# Altium PCB PCB1.PcbDoc
Units mm, origin at the board's own origin, x right, y up, seen from the top; angles counter-clockwise.
Board outline 50 x 50 mm, 4 copper layers (Top Layer, Internal Plane 1, Internal Plane 2, Bottom Layer), stack 0.462 mm thick; 29 components, 23 nets, 105 pads, 0 vias.
Unrouted connection lines stored in the file: 52.
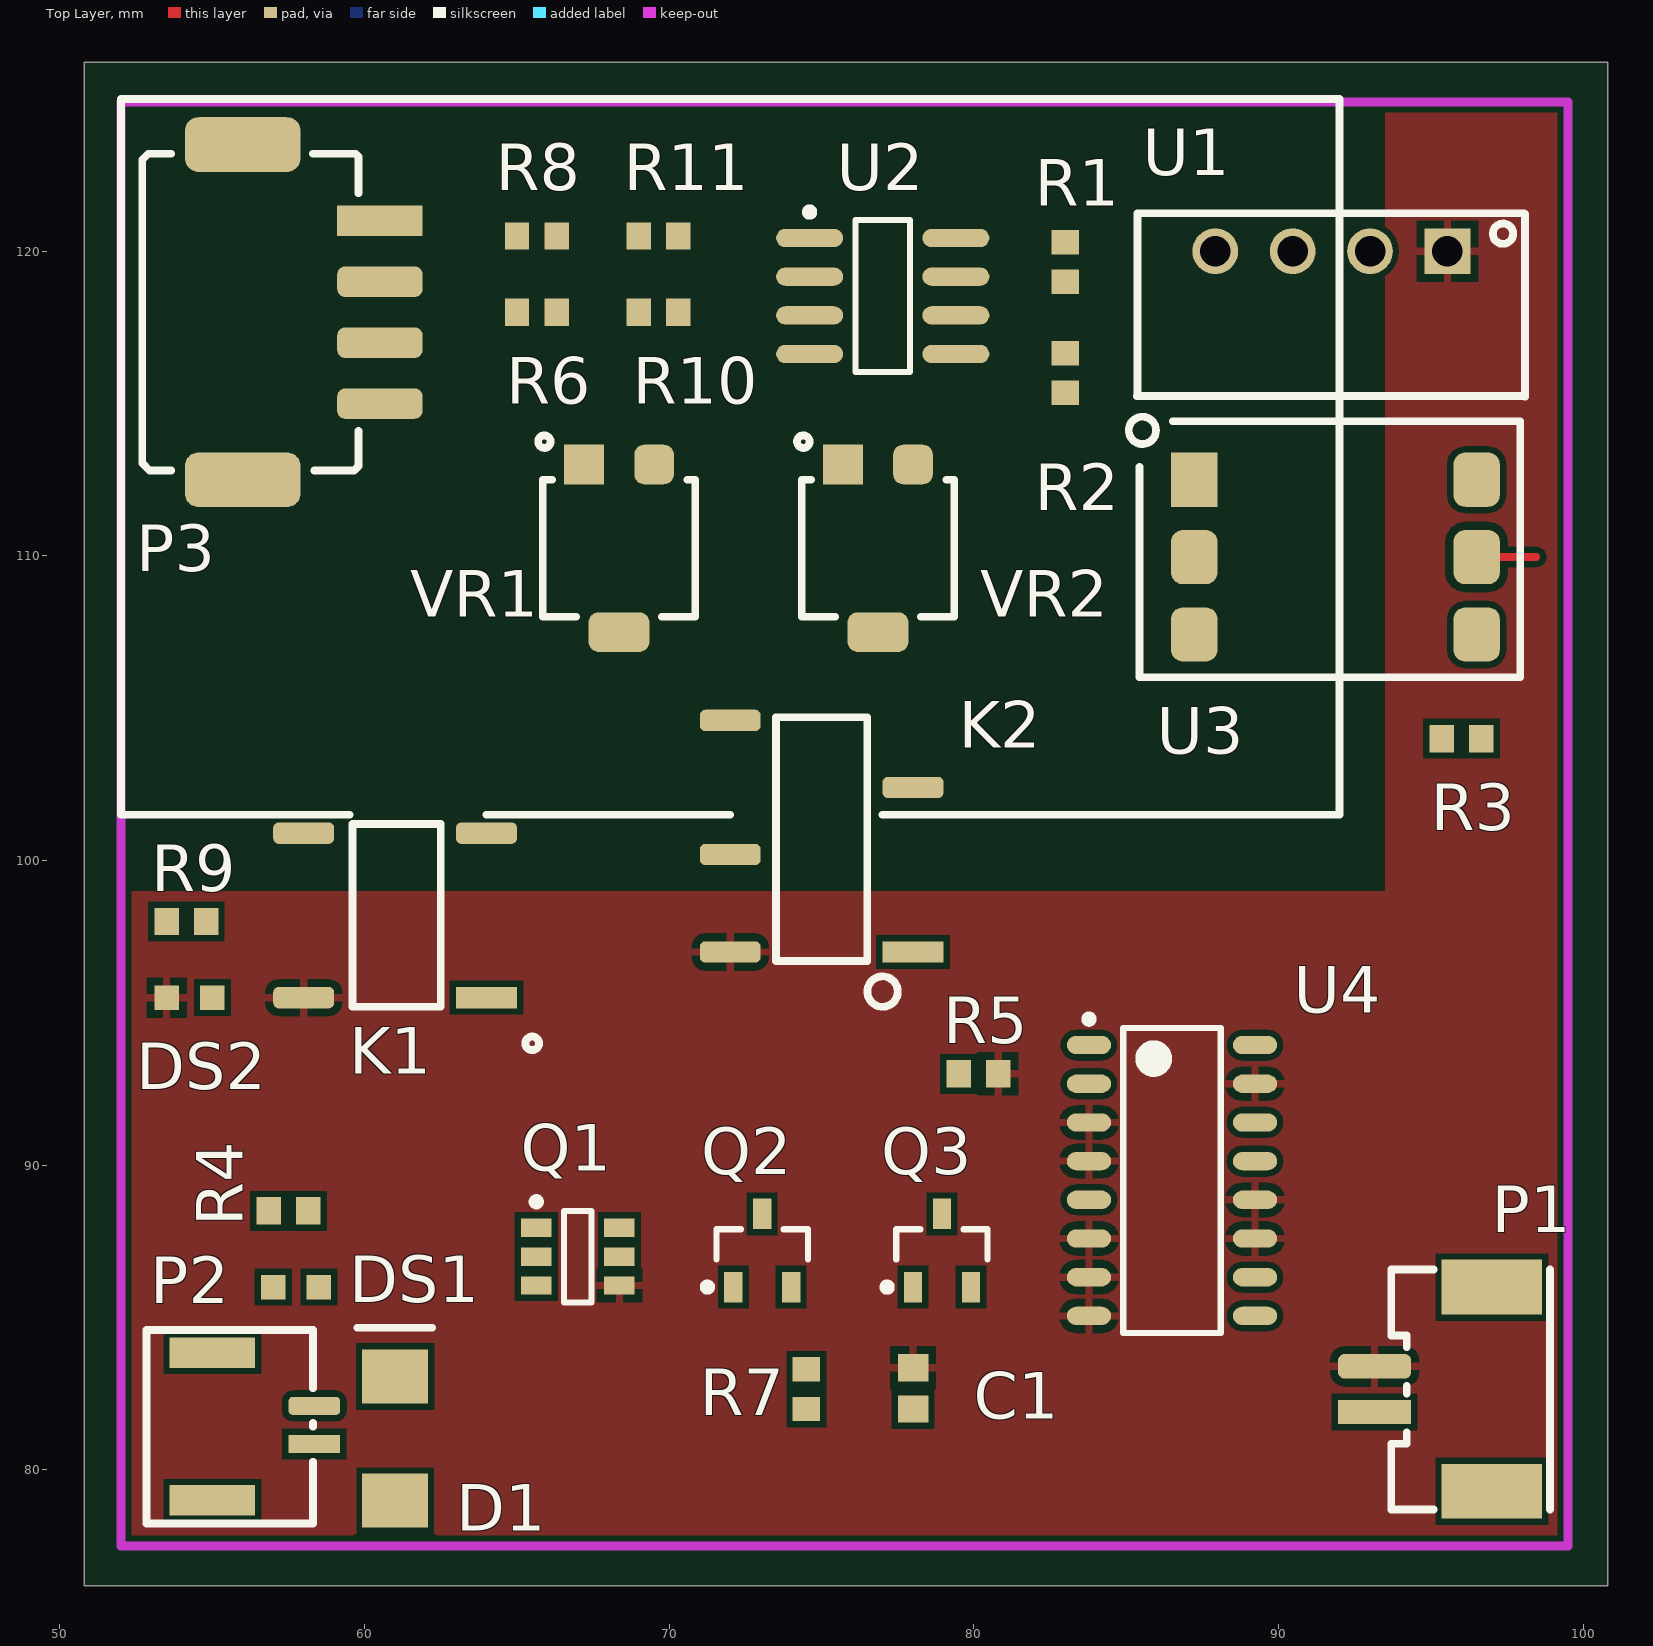
[diagram p0: Top Layer view]
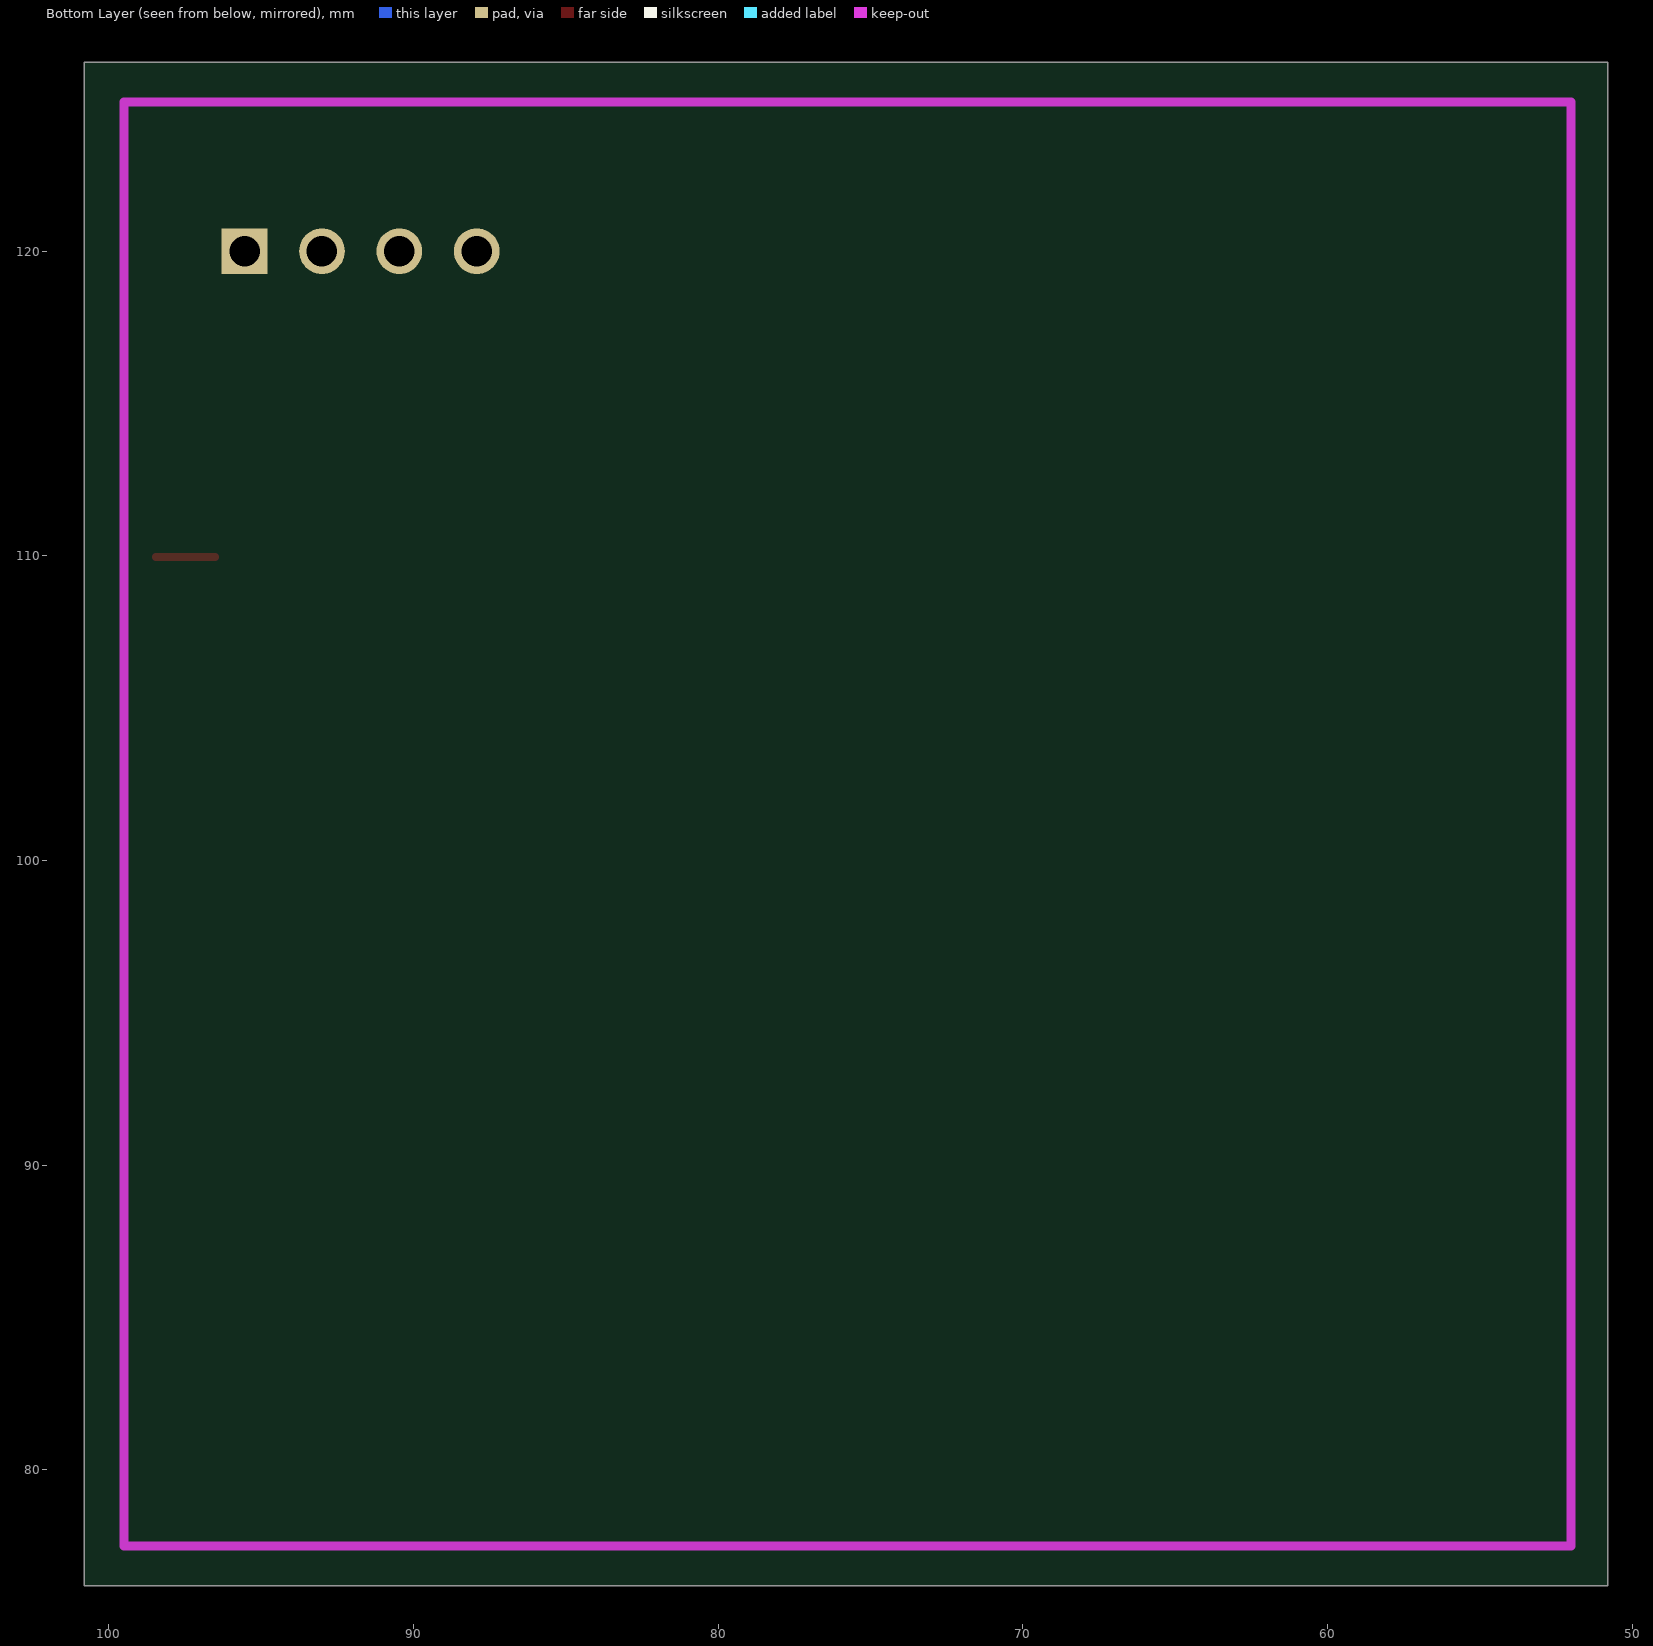
[diagram p1: Bottom Layer view, seen from below]
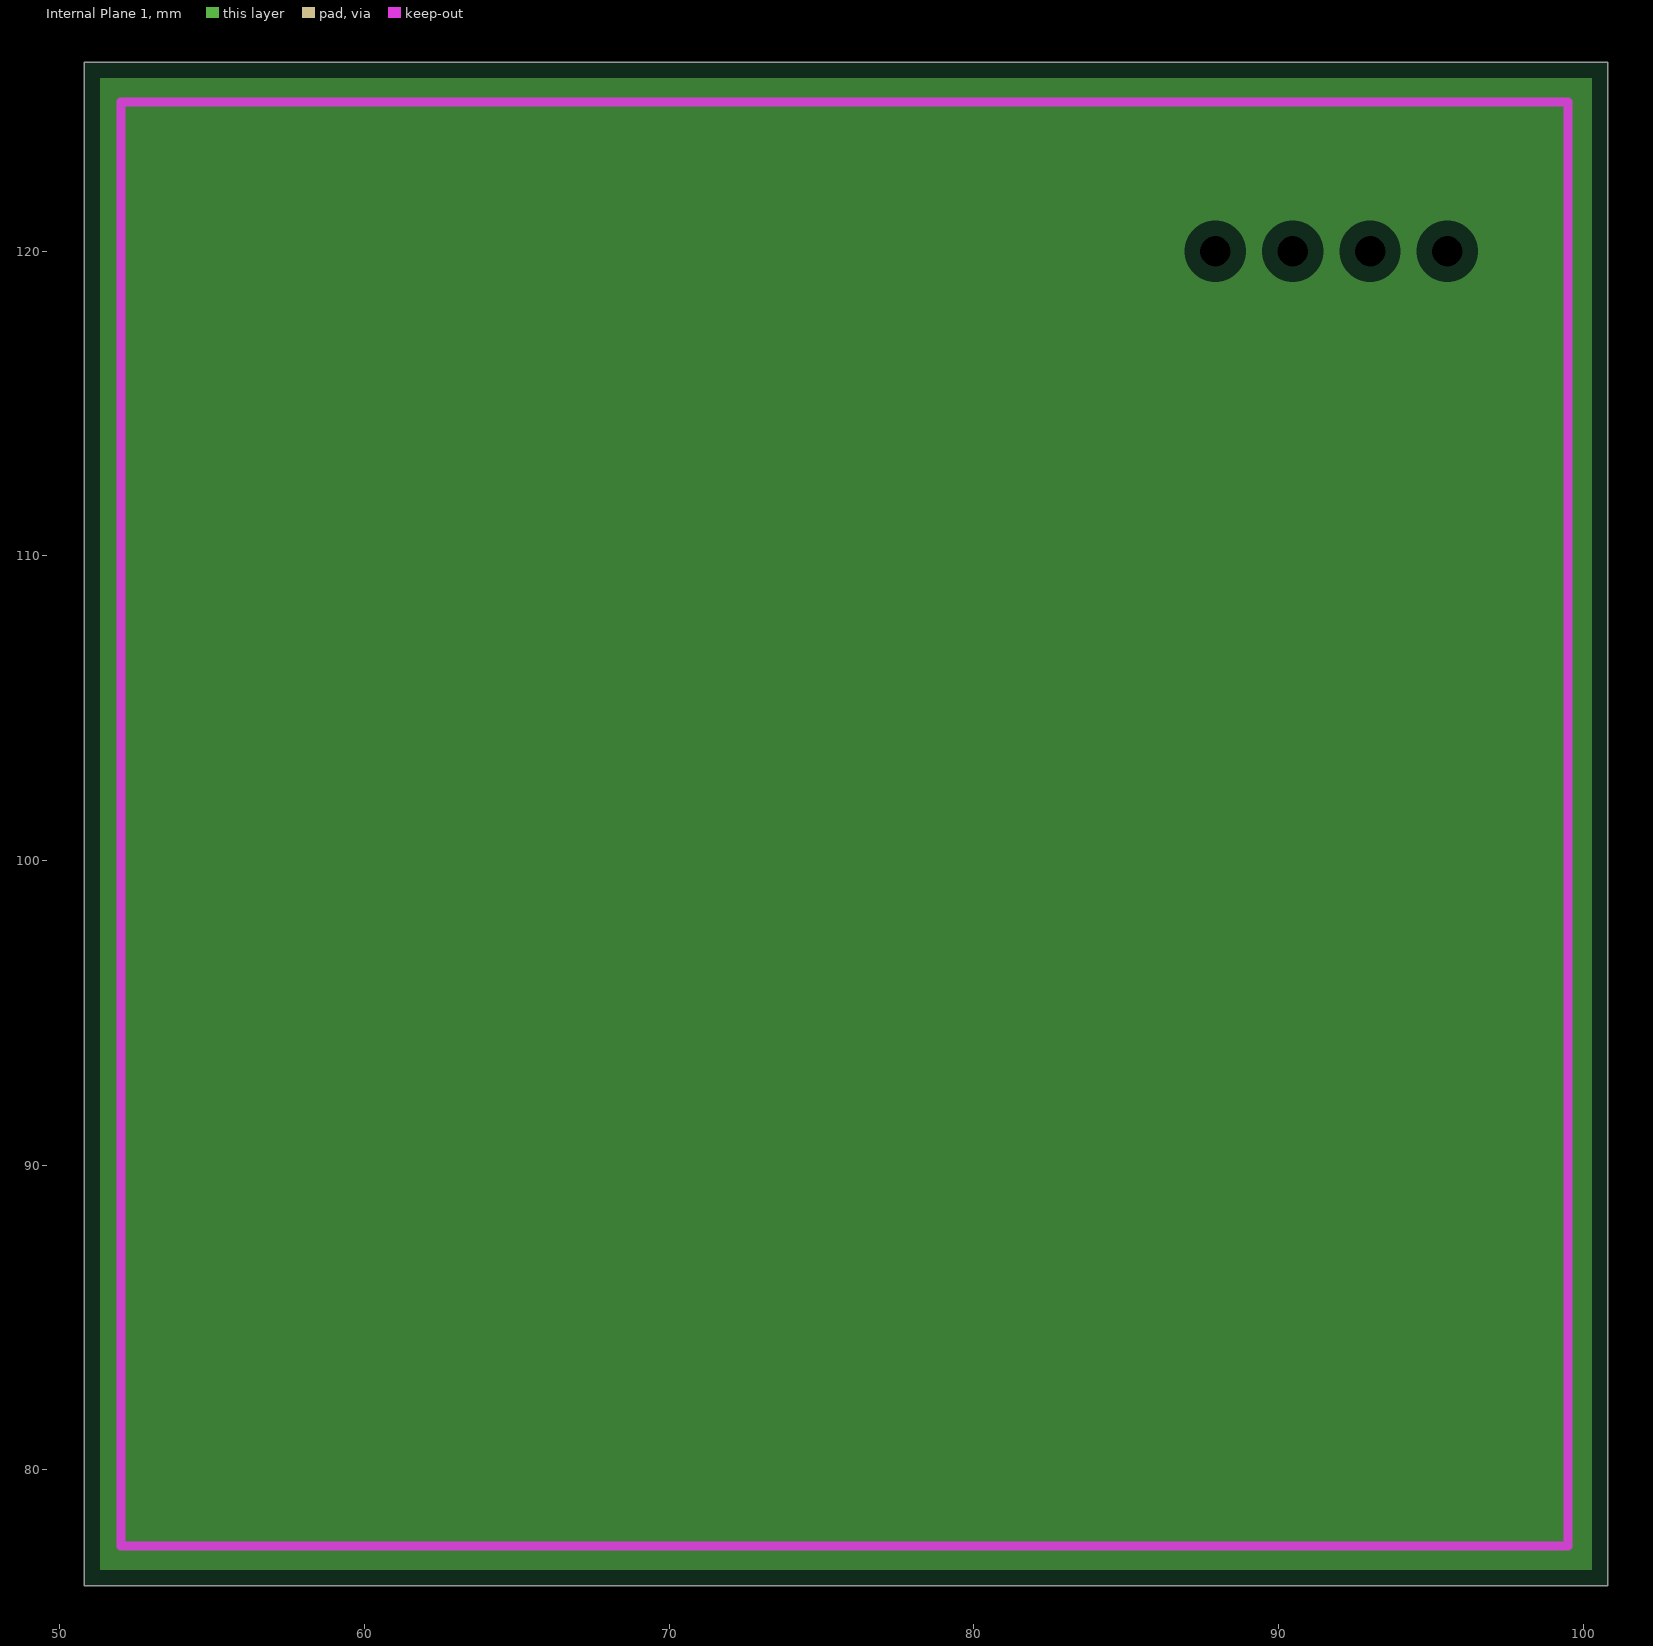
[diagram p2: Internal Plane 1, clearances drawn from the general rule]
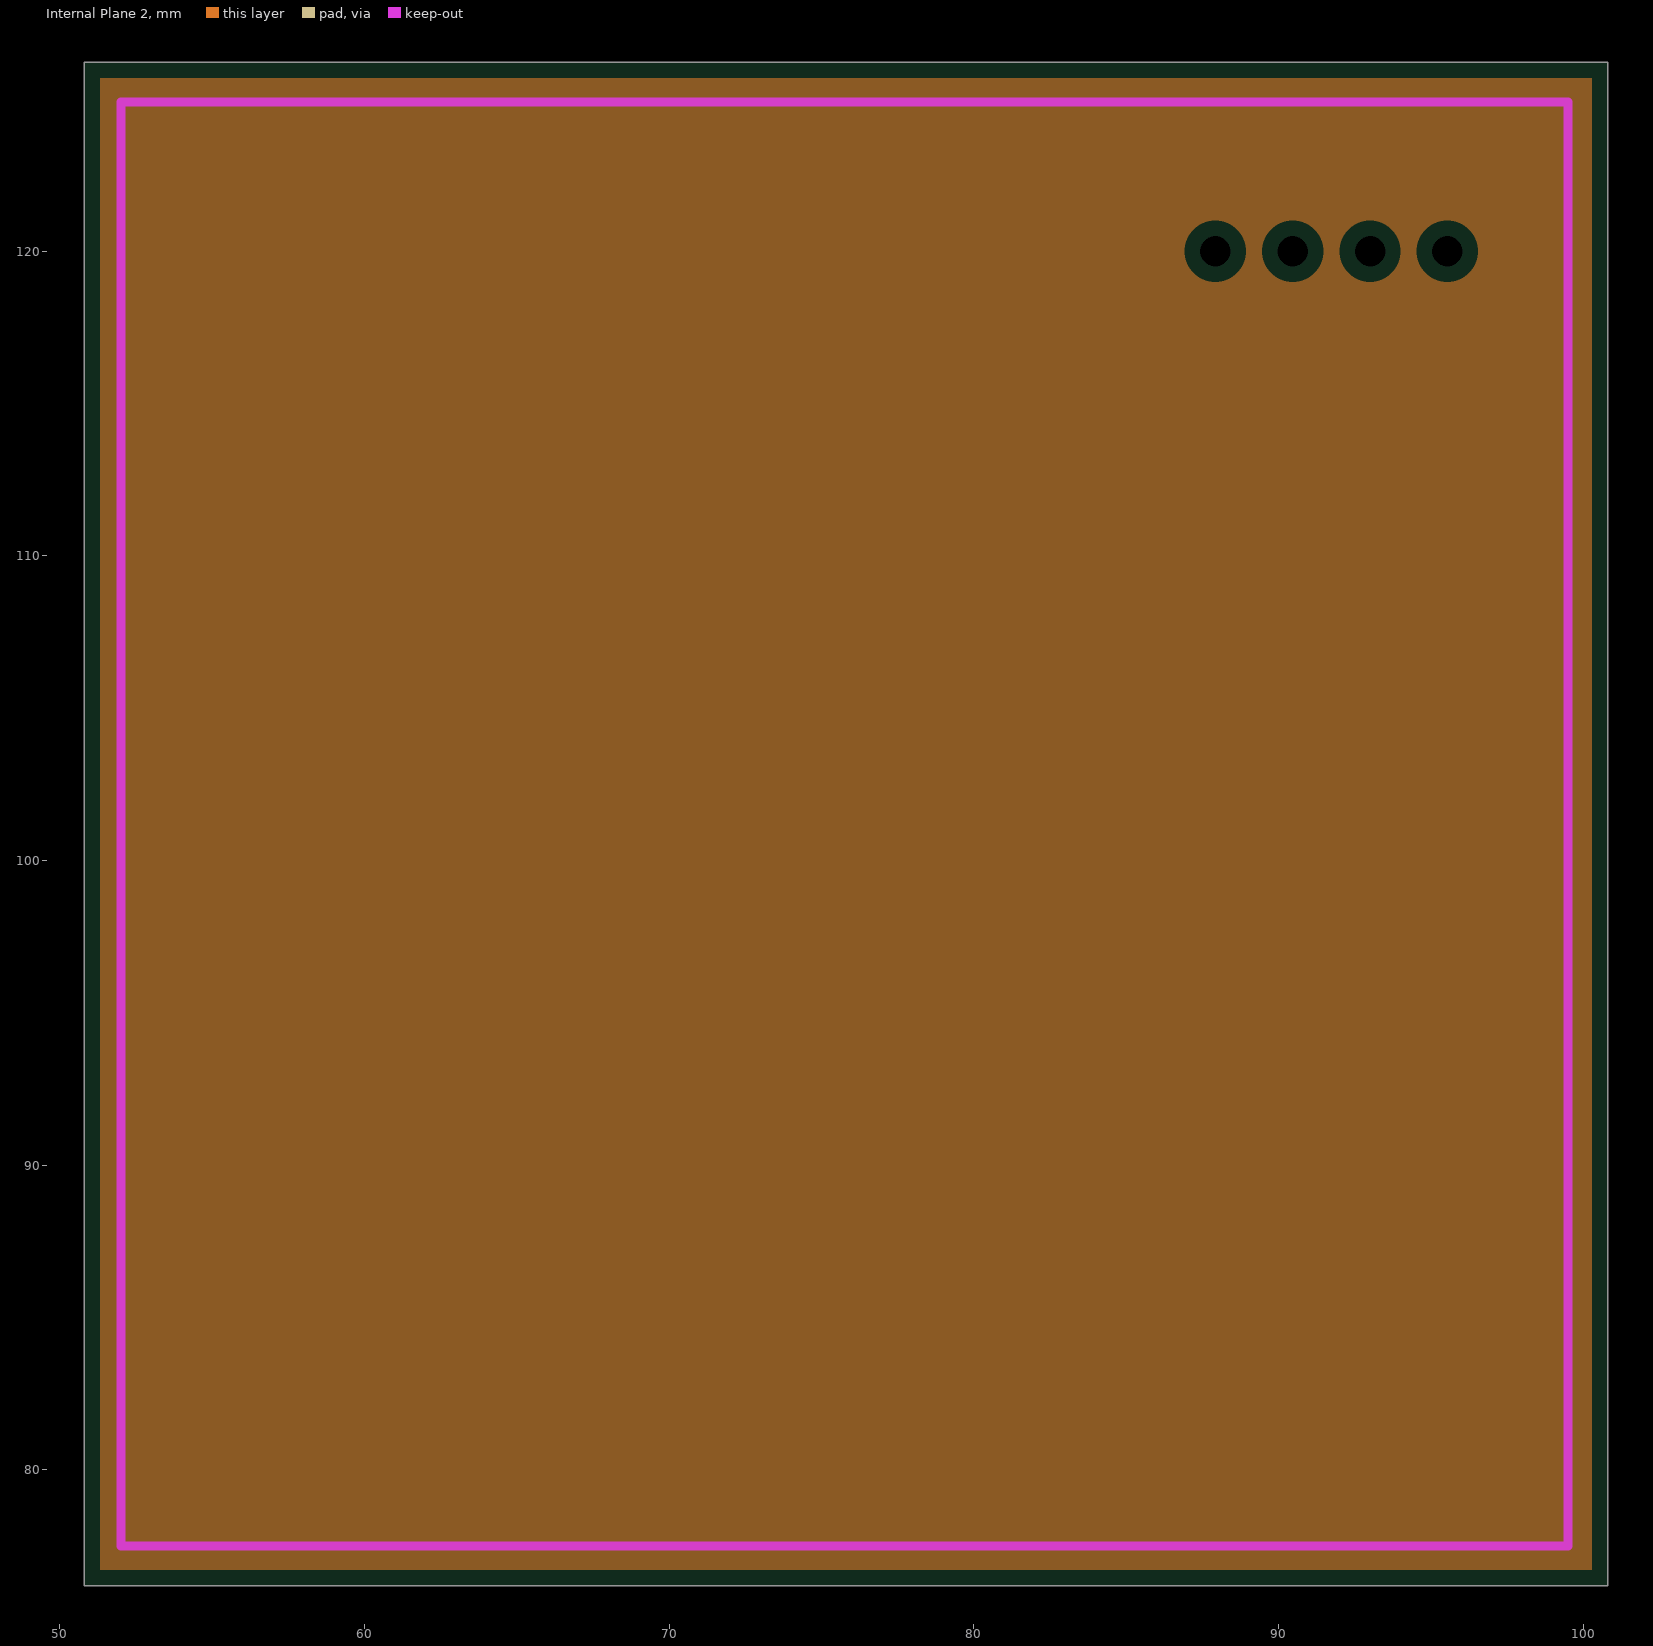
[diagram p3: Internal Plane 2, clearances drawn from the general rule]

## Layer stack, top to bottom
Top Solder: solder mask 0.0102, Solder Resist, Dk 3.5
Top Layer: signal copper 0.0356
Internal Plane 1: plane copper 0.0356
Internal Plane 2: plane copper 0.0356
Dielectric 1: dielectric 0.32, FR-4, Dk 4.8
Bottom Layer: signal copper 0.0356
Bottom Solder: solder mask 0.0102, Solder Resist, Dk 3.5

## Board outline
50.8,76.2 100.8,76.2 100.8,126.2 50.8,126.2

## Design rules (kind name [scope] priority, off if disabled: settings)
Clearance [All] p1: gap=0.2
PlaneClearance [All] p1: clearance=0.508
PlaneConnect [All] p1: planeconnectstyle=Relief reliefexpansion=0.508 reliefentries=4 reliefconductorwidth=0.254 reliefairgap=0.254
PolygonConnect [All] p1: connectstyle=Relief reliefconductorwidth=0.254 reliefentries=4 polygonreliefangle="90 Angle" airgapwidth=0.254
RoomDefinition Sheet1 [InComponentClass('Sheet1')] p1: confinementstyle=ConfineIn formatcopy=TRUE lockcomponents=FALSE outline 101.981,77.851 286.385,77.851 286.385,93.853 101.981,93.853
RoutingVias [All] p1: holewidth=0.3 width=1 viastyle="Through Hole" minholewidth=0.711 minwidth=1.27 maxholewidth=0.711 maxwidth=1.27
SolderMaskExpansion [All] p1: expansion=0.102
Width [All] p1: maxlimit=0.2 minlimit=0.2 preferedwidth=0.2
28 further rules are at their usual default settings.

## Components (designator, comment, footprint, x,y, rotation, side; value= is the part's Value field where it differs from the comment)
C1 "2.2uF" 0603 78,82.675 r270 top
D1 "Zener Diode" "DO-214AA Diode" 61,83.064 r270 top
DS1 "LED_G" LED_0603 57,86 r0 top
DS2 "LED_R" LED_0603 55,95.5 r180 top
K1 "Relay-SPST" RELAY-SPST 64,95.5 r90 top
K2 "Relay-SPDT" RELAY_SPDT 72,100.2 r90 top
P1 "12V Power" WM9811CT-ND 98.016,75.398 r90 top
P2 "CAN" WM4780CT-ND 56.143,81.159 r90 top
P3 "4 Position Clik-Mate HV Surface Mount" WM2282CT-ND 60.5,121 r270 top
Q1 "MOSFET-P" P-MOSFET 67,87 r0 top
Q2 "MOSFET-N" "N-CH MOSFET SOT-23" 73.05,87.2 r90 top
Q3 "MOSFET-N" "N-CH MOSFET SOT-23" 78.95,87.2 r90 top
R1 "10K" RES_0603 83,119.65 r90 top
R2 "RES SMD 6.2K OHM 5% 1/10W 0603" RES_0603 83,116 r270 top
R3 "10K" RES_0603 96,104 r0 top
R4 "820 Ohm" RES_0603 57.5,88.5 r180 top
R5 "10K" RES_0603 80.15,93 r180 top
R6 "470K" RES_0603 65.65,118 r0 top
R7 "33K" RES_0603 74.5,82.65 r270 top
R8 "470K" RES_0603 65.65,120.5 r0 top
R9 "820 Ohm" RES_0603 54.15,98 r0 top
R10 "33K" RES_0603 69.65,118 r180 top
R11 "33K" RES_0603 69.65,120.5 r0 top
U1 "RM-1212S DCDC" RM-1212S 95.54,120 r180 top
U2 "LM311" SOIC8 77,118.5 r0 top
U3 "H11L1S" H11LS 87.23,107.42 r0 top
U4 "CD4043B SR Latch" CD4043BDR-16SOIC 86.5,89.5 r0 top
VR1 "20k 0.25W Pot" "20K POT" 68.35,107.5 r90 top
VR2 "20k 0.25W Pot" "20K POT" 76.85,107.5 r90 top

## Footprints (in the part's own frame and the unit in brackets; to place one, negate y for a bottom-side part, rotate by r counter-clockwise, add the part's x,y. Pads: shape width x height; smd on the part's side, far side on the other; paste and mask are expansions set on the pad)
"20K POT" [mm]
  rect 1.3x1.3 smd: 1(5.5,1.15)
  rrect50% 1.3x2 smd: 2(0,0)
  rrect50% 1.3x1.3 smd: 3(5.5,-1.15)
  silkscreen extent 0.5,-2.5 6.46,2.66
0603 [mm] "Chip Capacitor, 2-Leads, Body 1.60x0.81mm, IPC Medium Density"
  rect 0.9x1 smd: 1(-0.675,0) 2(0.675,0)
  body extent -0.87,-0.48 0.87,0.48, height 0.9
CD4043BDR-16SOIC [mm] "SR LATCH"
  oval 1.45x0.6 smd: 1(-2.725,4.445) 2(-2.725,3.175) 3(-2.725,1.905) 4(-2.725,0.635) 5(-2.725,-0.635) 6(-2.725,-1.905) 7(-2.725,-3.175) 8(-2.725,-4.445) 9(2.725,-4.445) 10(2.725,-3.175) 11(2.725,-1.905) 12(2.725,-0.635) 13(2.725,0.635) 14(2.725,1.905) 15(2.725,3.175) 16(2.725,4.445)
  silkscreen extent -2.85,-5 1.6,5.42, body extent -2,-5 2,5, height 1.75
"DO-214AA Diode" [mil] "Zener Diode 16V 5W SMBJ5353B-TP"
  rect 70x85 smd: 1(0,0) 2(160,0)
  silkscreen extent -63,-49 -63,48
H11LS [mm] "Logic Output Optoisolator Open Collector 1080-1201-6-ND"
  rect 1.52x1.78 smd: 1(0,5.08)
  rrect50% 1.52x1.78 smd: 2(0,2.54) 3(0,0) 4(9.27,0) 5(9.27,2.54) 6(9.27,5.08)
  silkscreen extent -2.15,-1.4 10.7,7.15
LED_0603 [mm]
  rect 0.8x0.8 smd: 1(0,0) 2(1.5,0)
"N-CH MOSFET SOT-23" [mm] "SI2318CDS-T1-GE3CT-ND"
  rect 1x0.6 smd: 1(-1.2,0.95) 2(-1.2,-0.95) 3(1.2,0)
  silkscreen extent -1.32,-1.5 0.7,1.92, body extent -0.7,-1.52 0.7,1.52, height 1.12
P-MOSFET [mm] "SOT23, 6-Leads, Body 2.93x2.80mm, Pitch 0.95mm, IPC Medium Density"
  rect 1x0.6 smd: 1(-1.365,0.95) 2(-1.365,0) 3(-1.365,-0.95) 4(1.365,-0.95) 5(1.365,0) 6(1.365,0.95)
  silkscreen extent -1.49,-1.5 0.45,1.92, body extent -1.5,-1.52 1.5,1.52, height 1.25
RELAY-SPST [mm]
  rect 0.7x2 smd: 1(0,0)
  rrect50% 0.7x2 smd: 3(5.4,0) 6(5.4,6) 8(0,6)
  silkscreen extent -1.72,-1.72 5.7,4.4
RELAY_SPDT [mm]
  rect 0.7x2 smd: 1(-3.2,-6)
  rrect50% 0.7x2 smd: 3(2.2,-6) 5(4.4,0) 7(0,0) 8(-3.2,0)
  silkscreen extent -5,-5.5 4.5,-1.5
RES_0603 [mm] "Chip Resistor, 2-Leads, Body 1.60x0.80mm, IPC Medium Density"
  rect 0.8x0.9 smd: 1(-0.65,0) 2(0.65,0)
  body extent -0.85,-0.45 0.85,0.45, height 0.5
RM-1212S [mm]
  rect 1.5x1.5 hole 1: 1(0,0)
  round 1.5 hole 1: 2(2.54,0) 3(5.08,0) 4(7.62,0)
  silkscreen extent -2.55,-1.25 10.2,4.77, body extent -2.68,-1.38 10.33,4.9, height 10
SOIC8 [mm]
  oval 2.2x0.6 smd: 1(-2.394,1.935) 2(-2.394,0.665) 3(-2.394,-0.605) 4(-2.394,-1.875) 5(2.406,-1.875) 6(2.406,-0.605) 7(2.406,0.665) 8(2.406,1.935)
  silkscreen extent -2.52,-2.47 0.91,2.91, body extent -1.99,-2.47 2.01,2.53, height 1.75
WM2282CT-ND [mm] "4 Position 2.0mm Clik-Mate Connectors"
  rect 1x2.8 smd: 1(0,0)
  rrect50% 1x2.8 smd: 2(2,0) 3(4,0) 4(6,0)
  rrect50% 1.8x3.8 smd: ""(-2.5,-4.5) ""(8.5,-4.5)
  silkscreen extent -2.2,-7.8 8.2,-0.7
WM4780CT-ND [mm]
  rect 0.6x1.7 smd: 1(-0.309,-2.207)
  rrect50% 0.6x1.7 smd: 2(0.941,-2.207)
  rect 1x2.8 smd: ""(-2.159,1.143) ""(2.691,1.143)
  silkscreen extent -2.92,-2.16 3.43,3.3
WM9811CT-ND [mm]
  rect 0.8x2.4 smd: 1(6.502,4.866)
  rrect50% 0.8x2.4 smd: 2(8.002,4.866)
  rect 1.8x3.3 smd: ""(3.902,1.016) ""(10.602,1.016)
  silkscreen extent 3.3,-0.89 11.18,4.32

## Part data
C1: library part "CAP CER 2.2UF 25V 10% 0603", "2.2µF ±10% 25V Ceramic Capacitor X5R 0603 (1608 Metric)"
D1: "Zener Diode 16V 5W ±5% Surface Mount DO-214AA (SMB)"
DS1: "Green LED 0603"
DS2: "Red LED 0603"
K1: "Telecom Relay SPST-NO (1 Form A) Surface Mount"
K2: "Telecom Relay SPDT (1 Form C) Surface Mount"
P1: library part "2 Position Clik-Mate 12V Connector", "2 Position Receptacle Connector 0.059\" (1.50mm) Surface Mount Tin"
P2: library part "2 Position Clik-Mate CAN Connector", "2 Position Receptacle Connector 0.049\" (1.25mm) Surface Mount Tin"
P3: "4 Position Receptacle Connector 0.079\" (2.00mm) Surface Mount, Right Angle Tin"
Q1: "MOSFET P-CH 30V 4A SOT23-6"
Q2 Q3: "MOSFET N-CH 50V 200MA SOT23-3"
R1 R3 R5: library part "RES SMD 10K OHM 1% 1/10W 0603", "RES SMD 10K OHM 1% 1/10W 0603"
R4 R9: library part "RES SMD 820 OHM 5% 1/4W 0603", "RES SMD 820 OHM 5% 1/4W 0603"
R6 R8: library part "RES 470K OHM 1% 1/4W 0603", "RES SMD 470K OHM 1% 1/4W 0603"
R7 R10 R11: library part "RES 33K OHM 1% 1/4W 0603", "RES 33K OHM 1% 1/4W 0603"
U3: "OPTOISO 5KV OPEN COLLECTOR 6SMD"
U4: "S-R Latch 4 Channel 1:1 IC Tri-State 16-TSSOP"
VR1 VR2: "20k Ohm 0.25W, 1/4W Gull Wing Surface Mount Trimmer Potentiometer"

## Nets (pads, with @x,y where several pads share a name; then routed paths per layer and width w, separated by ;. In a path a pad name is that pad's centre, name@x,y a point inside that pad or via, vN(x,y) a via of type N, cw(c..) or ccw(c..) an arc to the next point about the centre after c; other vN are vias at no path point)
BAT_IN: K1.3 P3.1
DCDC_IN: Q3.2 U1.2
GND: C1.1 DS2.2 K1.8 K2.8 P1.2 Q1.4 R5.1 U1.1 U3.5 U4.3 U4.4 U4.6 U4.7 U4.8 U4.11 U4.12 U4.15
IN+: R6.1 R10.2 U2.2
IN-: R8.1 R11.2 U2.3
ISO_12V: R1.2 U1.4 U2.8
ISO_GND: R11.1 U1.3 U2.1 U2.4 U3.2 U3.3 VR2.2 VR2.3
LATCH_IN: U3.4 U4.14
LATCH_OUT: Q1.3 Q2.1 R5.2 U4.1
MAIN_RELAY_GND: D1.1 DS1.2 P2.2 Q1.1
NetC1_2: C1.2 Q3.1 R7.2
NetDS1_1: DS1.1 R4.2
NetDS2_1: DS2.1 R9.2
NetK1_1: K1.1 Q2.2 R7.1 R9.1
NetR1_1: R1.1 R2.1 U2.7
NetR2_2: R2.2 U3.1
NetR6_2: R6.2 VR1.2 VR1.3
NetR10_1: R10.1 VR2.1
NetU2_5: U2.5 U2.6
PRECHARGEIN: K1.6 P3.2 R8.2
PRECHARGEOUT: K2.3 P3.3 VR1.1
"TO DISCHARGE RESISTOR": K2.7 P3.4
VCC: D1.2 K2.1 P1.1 P2.1 Q2.3 Q3.3 R3.2 R4.1 U3.6 U4.5 U4.16
pads on no net: K2.5 P1. P2. P3. Q1.2 Q1.5 Q1.6 R3.1 U4.2 U4.9 U4.10 U4.13
copper on no net: | length 2
  Top Layer w0.254: 96.5,109.96 98.46,109.96

## Polygon pours and split planes (outlines as drawn)
GND on Top Layer "GND" (solid, remove dead copper, pour order 6): 99.5,124.9 99.5,77.5 52,77.5 52,99 54,99 93.5,99 93.5,112 93.5,124.9

## Keep-outs
Keep-Out Layer:
  lines w0.3: 52,77.5 52,124.9 99.5,124.9 99.5,77.5 52,77.5

## Silkscreen, mask and mechanical layers (free items; w line width, h text height)
Top Overlay:
  lines w0.254: 59.5,101.5 57.5,101.5 52,101.5 52,125 92,125 92,101.5 77,101.5 ; 64,101.5 72,101.5
Drill Drawing:
  text "Drill Drawing." at 105.88,78.74 h1.52
  text ".LEGEND" at 47.38,31.28 h1.52

## Dimensions
52,77.5 to 52,124.9 on Mechanical 1
52,77.5 to 99.5,77.5 on Mechanical 1